# Altium PCB ExtendBoard.PcbDoc
Units mil, origin at the board's own origin, x right, y up, seen from the top; angles counter-clockwise.
Board outline 1157 x 1033 mil, 2 copper layers (Top1, Bottom4), stack 42.17 mil thick; 26 components, 21 nets, 78 pads, 26 vias.
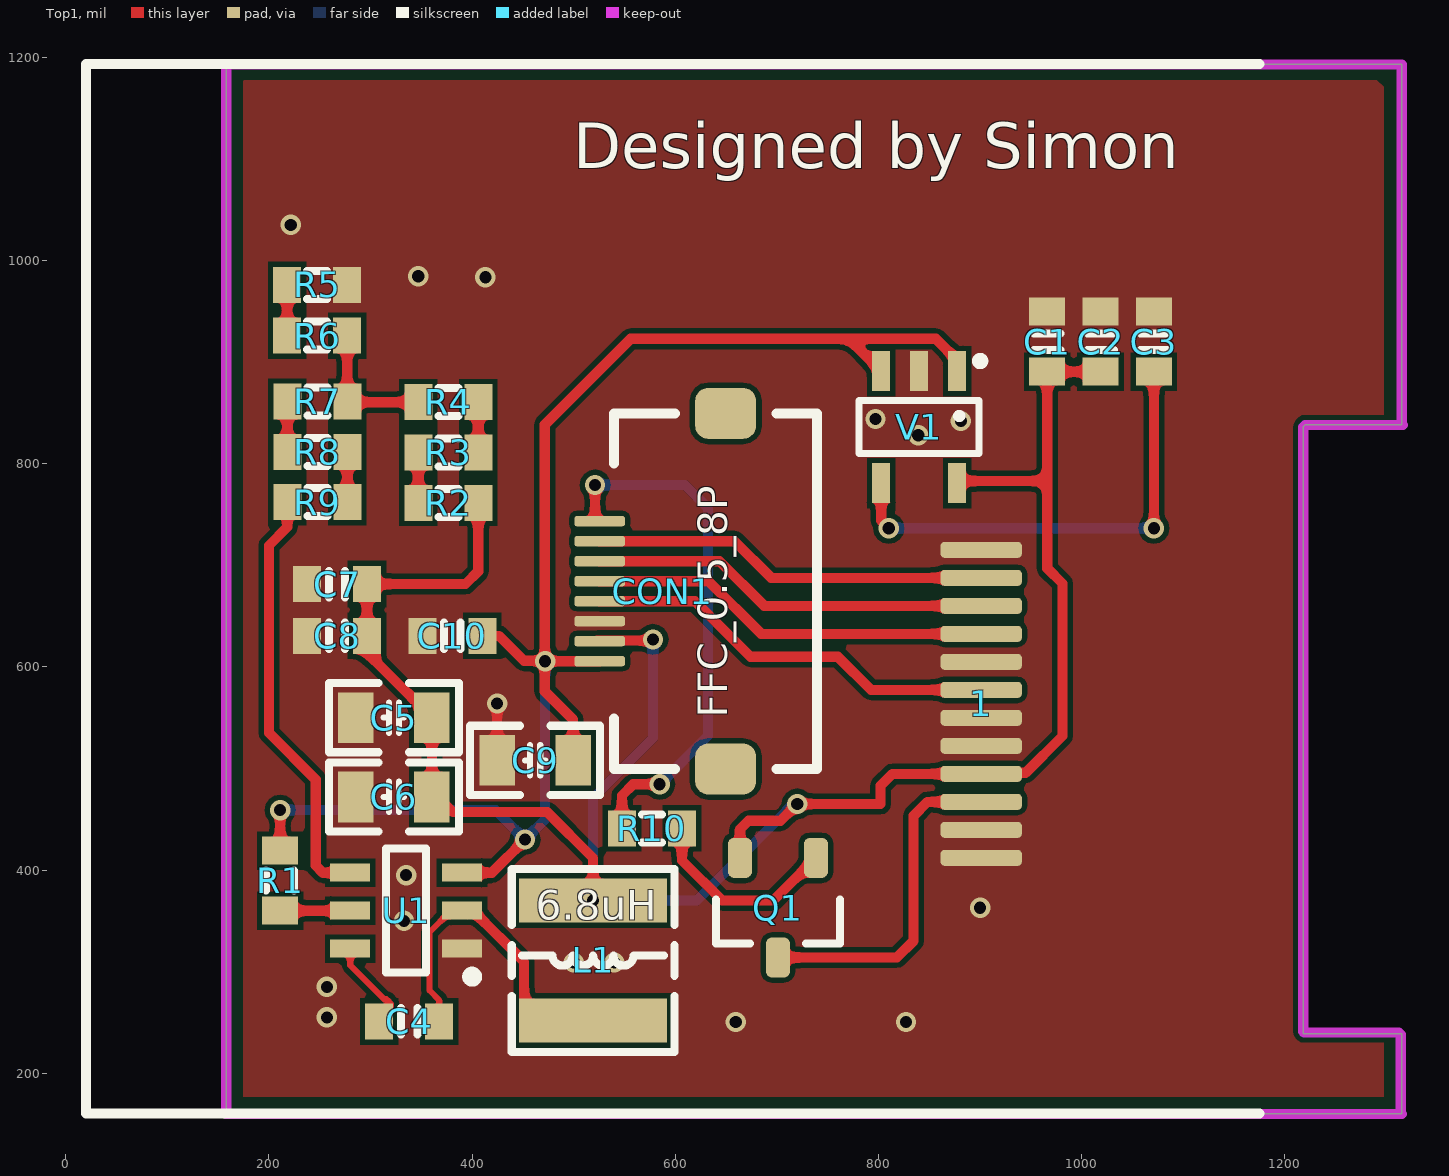
[diagram p0: Top1 view]
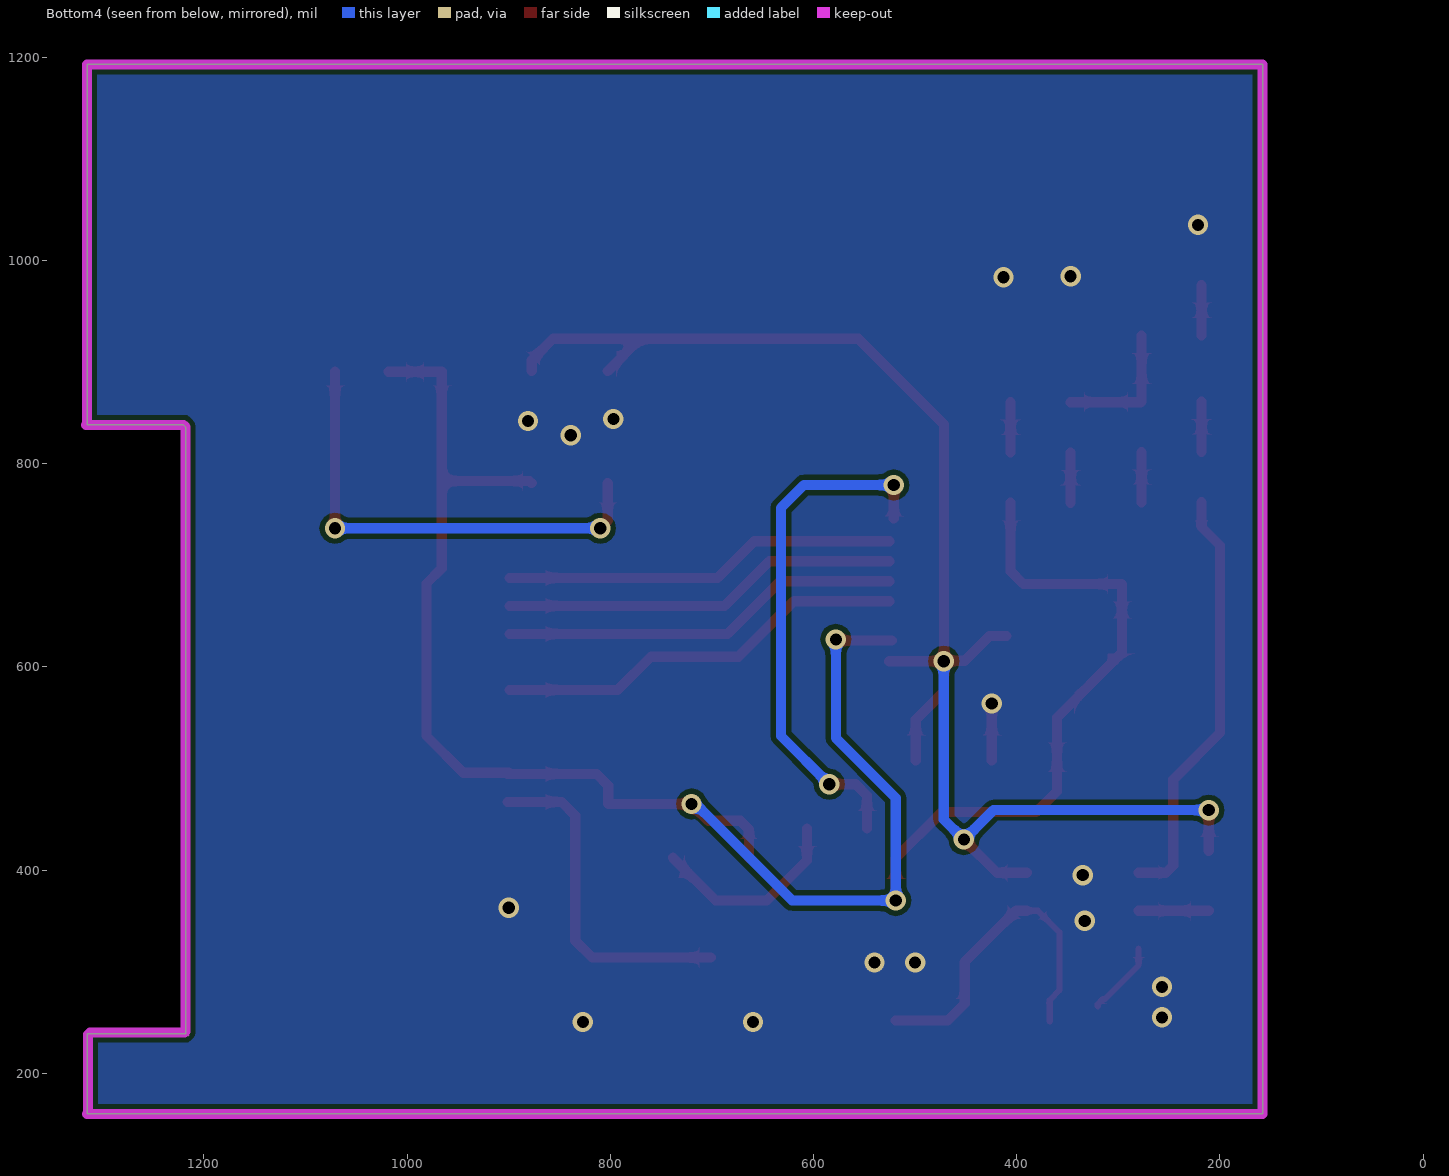
[diagram p1: Bottom4 view, seen from below]

## Layer stack, top to bottom
Top Solder: solder mask 0.4, Solder Resist, Dk 3.5
Top1: signal copper 1.4
Dielectric 2: core 39.37, PP-006, Dk 4.2
Bottom4: signal copper 1.4
Bottom Solder: solder mask 0.4, Solder Resist, Dk 3.5

## Board outline
158,160 158,1193 1315,1193 1315,839 1315,838.49 1220.49,838.49 1218,836 1218,239 1315,239 1315,160

## Design rules (kind name [scope] priority, off if disabled: settings)
Clearance [All] p1: gap=5 ignorepadtopadclearanceinfootprint=FALSE
ComponentClearance [All] p1: gap=0 collisioncheckmode=3 verticalgap=0 showdistances=TRUE
DiffPairsRouting [All] p1: maxlimit=9 minlimit=9 mostfreqgap=9 toplayer_minwidth=4 toplayer_maxwidth=4 toplayer_prefwidth=4 bottomlayer_minwidth=4 bottomlayer_maxwidth=4 bottomlayer_prefwidth=4 maxuncoupledlength=500
FanoutControl Fanout_BGA [All] p1: bgadir=Out bgaviamode=Centered fanoutstyle=Auto fanoutdirection=Alternating viagrid=1 // Fanout_BGA (Default Rule)
HoleSize [All] p1: absolutevalues=TRUE maxlimit=10000 minlimit=8 maxpercent=80.000 minpercent=20.000
MinimumSolderMaskSliver [All] p1 off: minsoldermaskwidth=2
PlaneClearance [All] p1: clearance=8
PlaneConnect [All] p1: planeconnectstyle=Direct reliefexpansion=20 reliefentries=4 reliefconductorwidth=10 reliefairgap=10
PolygonConnect [All] p1: connectstyle=Direct reliefconductorwidth=10 reliefentries=4 polygonreliefangle="90 Angle" airgapwidth=10
RoutingVias [All] p1: holewidth=8 width=16 viastyle="Through Hole" minholewidth=6 minwidth=12 maxholewidth=28 maxwidth=50
SilkToBoardRegionClearance [All] p1 off:
SilkToSilkClearance [All] p1: silktosilkclearance=0
SilkToSolderMaskClearance [IsPad] p1: minsilkscreentomaskgap=0 clearancetoexposedcopper=TRUE
SolderMaskExpansion [All] p1: expansion=3 istentingtop=FALSE
Width [All] p1: maxlimit=10000 minlimit=4 preferedwidth=10
20 further rules are at their usual default settings.

## Components (designator, comment, footprint, x,y, rotation, side; value= is the part's Value field where it differs from the comment)
1 "LCD-240x240" LCD-240x240-NoHole 694,694 r270 bottom locked
C1 "1uF" CAP_0603 951,920 r90 top
C2 "103" CAP_0603 1003.5,920 r90 top
C3 "103" CAP_0603 1086,920 r270 top
C4 "1uF" CAP_0603 338,266 r0 top
C5 "22uF" "C 0805_L" 323,550 r0 top
C6 "22uF" "C 0805_L" 323,472 r0 top
C7 "22uF" CAP_0603 267,696.5 r0 top
C8 "22uF" CAP_0603 267,645.5 r0 top
C9 "22uF" "C 0805_L" 462,508 r0 top
C10 "22uF" CAP_0603 380.5,645.5 r0 top
CON1 "FFC_0.5_8" FFC_0.5_8 614.5,674.5 r90 top locked
L1 "6.8uH" NR4030 519,311 r270 top
Q1 "AO3415A" SOT23-3 701,363 r270 top
R1 "100K" RES_0603 226,389.5 r270 top
R2 "40.2K/3" RES_0603 376.5,776.53 r0 top
R3 "40.2K/3" RES_0603 376.5,796.03 r180 top
R4 "40.2K/3" RES_0603 376.5,875.53 r0 top
R5 "13K/2" RES_0603 247.5,991 r0 top
R6 "13K/2" RES_0603 247.5,911 r180 top
R7 "40.2K/3" RES_0603 247.63,876.03 r0 top
R8 "40.2K/3" RES_0603 247.63,796.53 r180 top
R9 "40.2K/3" RES_0603 247.63,777.03 r0 top
R10 "1K" RES_0603 577,426 r180 top
U1 "MP1471 降压芯片" SOT23-6L 335,360 r90 top
V1 "ME6211C33" SOT23-5L 840,836 r180 top

## Footprints (in the part's own frame and the unit in brackets; to place one, negate y for a bottom-side part, rotate by r counter-clockwise, add the part's x,y. Pads: shape width x height; smd on the part's side, far side on the other; paste and mask are expansions set on the pad)
"C 0805_L" [mil] "无极性贴片电容"
  rect 35x50 smd: 1(-37.4,0) 2(37.4,0)
  silkscreen extent -64,-34 64,34, body extent -39,-24 39,24, height 20
CAP_0603 [mm]
  rect 0.7x0.9 smd: 1(-0.75,-0.381) 2(0.75,-0.381)
  silkscreen extent -0.2,-0.71 0.2,-0.05, body extent -0.85,-0.86 0.85,0.09, height 0.9
FFC_0.5_8 [mil]
  rrect50% 50x60 smd: 0(-175,-35) 0(175,-35)
  rrect50% 10x50 smd: 1(-68.9,89) 2(-49.21,89) 3(-29.53,89) 4(-9.84,89) 5(9.84,89) 6(29.53,89) 7(49.21,89) 8(68.9,89)
  silkscreen extent -175,-125 175,75, body extent -187,-124 187,87, height 82
LCD-240x240-NoHole [mil]
  rrect50% 15.75x80 smd far side: 1(282,-207) 2(254.44,-207) 3(226.88,-207) 4(199.32,-207) 5(171.76,-207) 6(144.2,-207) 7(116.65,-207) 8(89.09,-207) 9(61.53,-207) 10(33.97,-207) 11(6.41,-207) 12(-21.15,-207)
  body extent -499,-565 534,673, height 20
NR4030 [mm] "4.0mm*4.0mm*3.0mm(长*宽*高）"
  rect 1.1x3.7 smd: 1(-1.5,0) 2(1.5,0)
  silkscreen extent -2.29,-2.03 2.29,2.03, body extent -2,-2 2,2, height 3.1
RES_0603 [mm]
  rect 0.7x0.9 smd: 1(-0.75,-0.381) 2(0.75,-0.381)
  silkscreen extent -0.25,-0.73 0.25,-0.03, body extent -0.85,-0.86 0.85,0.09, height 0.9
SOT23-3 [mm] "SOT23, 3-Leads, Body 3.1x3.0mm (max), Pitch 0.95mm, IPC Medium Density"
  rrect50% 1x0.6 smd: 1(-1.246,0.95) 2(-1.246,-0.95) 3(1.246,0)
  silkscreen extent -0.2,-1.55 0.9,1.55, body extent -1.3,-1.45 1.5,1.45, height 1.2
SOT23-5L [mm] "3x1.6x1.1mm(长宽高)"
  rect 0.45x1 smd: 1(-0.95,-1.4) 2(0,-1.4) 3(0.95,-1.4) 4(0.95,1.4) 5(-0.95,1.4)
  silkscreen extent -1.6,-1.73 1.5,0.66, body extent -1.5,-1.4 1.5,1.4, height 1.15
SOT23-6L [mm] "3x1.6x1.1mm(长宽高)"
  rect 0.45x1 smd: 1(-0.95,-1.397) 2(0,-1.397) 3(0.95,-1.397) 4(0.95,1.397) 5(0,1.397) 6(-0.95,1.397)
  silkscreen extent -1.77,-1.78 1.55,0.51, body extent -1.5,-1.4 1.5,1.4, height 1.15

## Part data
1: "显示屏"
C1 C2 C3 C4 C7 C8 C10: library part cap
C5 C6 C9: library part C, "无极性贴片电容", BOM名称=无, 材质=X
CON1: "FFC", System=Connector
L1: library part L-NR, "NR磁胶电感", BOM名称=NR?
Q1: "MOSFET", LatestRevisionDate=17-Jul-2002, LatestRevisionNote="Re-released for DXP Platform.", PackageDescription="TO, Flat Index; 3 In-Line, Axial Leads; Body Dia. 4.6mm; Lead Dia. 0.5 mm (max)", PackageReference=E3, PackageVersion=1995/1996, Published=8-Jun-2000, Publisher="Altium Limited"
R1 R2 R3 R4 R5 R6 R7 R8 R9 R10: library part Res
U1: library part MP1471, "DC降压芯片", BOM名称=DC?
V1: library part ME6211, "低功耗LDO", BOM名称=低

## Via types
v1: diameter 20, hole 12, Top1 to Bottom4, 26 vias

## Nets (pads, with @x,y where several pads share a name; then routed paths per layer and width w, separated by ;. In a path a pad name is that pad's centre, name@x,y a point inside that pad or via, vN(x,y) a via of type N, cw(c..) or ccw(c..) an arc to the next point about the centre after c; other vN are vias at no path point)
3V3: 1.4 C1.1 C2.1 C5.2 C6.2 C7.2 C8.2 CON1.2 L1.1 Q1.2 R2.2 V1.5 | length 2120.1
  Top1 w10: R2.2 406.03,694.03 393.5,681.5 C7.2 C8.2 296.53,613.87 C5.2 360.4,477.6 381,457 473.86,457 519,411.86 v1(519,370.06) ; CON1.2@523,625.79 576.79,625.79 v1(578,627) ; Q1.2 663.6,440.1 672,448.5 703.5,448.5 v1(720.03,465.03) 802,465.03 802,483 813.68,494.68 1.4@899,494.68 ; V1.5 879.52,783 966,783 ; 1.4 1.4@899,494.68 ; C2.1 C1.1 966,783 ; 1.4@899,494.68 900.05,495.73 944.73,495.73 981,532 981,682 966,697 966,783
  Bottom4 w10: v1(578,627) 578,530 519,471 v1(519,370.06) 621.06,370.06 716.03,465.03 v1(720.03,465.03)
DC: 1.7 CON1.4 | length 409.7
  Top1 w10: CON1.4 619.34,664.66 674,610 760,610 792.65,577.35 1.7@899,577.35
FB: R9.1 U1.4 | length 421
  Top1 w10: R9.1 218.1,737.6 200,719.5 200,535 246,489 246,404.5 253.1,397.4 U1.4
GND: 1.1 1.2 1.5 1.6 1.8 1.12 C1.2 C2.2 C3.1 C5.1 C6.1 C7.1 C8.1 C9.1 C10.1 CON1.3 R5.2 U1.1 V1.2 | length 55.9
  Top1 w10: C9.1 v1(424.6,563.9)
  other v1: 659.5,250.5 827,250.5 257,255 257,285 500,309 540,309 333,350 900,363 335,395 839,828 881,842 797,844 413,983.5 346.97,984.5 221.5,1035
LCD_BL: CON1.8 R10.2 | length 522
  Top1 w4: CON1.8@521,745.9 CON1.8@523,743.9
  Top1 w10: CON1.8@521,745.9 v1(521,779) ; R10.2 547.47,473.47 558.5,484.5 v1(584.5,484.5)
  Bottom4 w10: v1(521,779) 609.5,779 632,756.5 632,532 v1(584.5,484.5)
LCD_BL_VCC: 1.3 Q1.3 | length 335.5
  Top1 w10: Q1.3 817.94,313.94 834.5,330.5 834.5,453.5 848.12,467.12 1.3
MOSI: 1.10 CON1.6 | length 391.7
  Top1 w10: CON1.6 643.47,704.03 687.47,660.03 1.10@899,660.03
NetC3_2: C3.2 V1.4 | length 466.4
  Top1 w10: V1.4 802.6,743.9 v1(810,736.5) ; v1(1071,736.5) C3.2
  Bottom4 w10: v1(810,736.5) v1@1075,736.5
NetC4_1: C4.1 U1.6 | length 74.4
  Top1 w6: U1.6 280,306.28 313.44,272.84 315.41,272.84 320.28,267.97 C4.1@320.28,266
NetC4_2: C4.2 L1.2 U1.2 | length 330.4
  Top1 w6: C4.2 367.53,271.97 358,281.5 358,338.83 379.17,360 U1.2
  Top1 w10: U1.2 400.83,360 451.17,309.66 451.17,268.6 467.82,251.94 L1.2
NetQ1_1: Q1.1 R10.1 | length 197.2
  Top1 w10: R10.1 606.53,409.47 646,370 696.35,370 Q1.1
NetR1_2: R1.2 U1.5 | length 69
  Top1 w10: R1.2 U1.5@279.97,359.97
NetR2_1: R2.1 R3.2 | length 49.5
  Top1 w10: R2.1 R3.2
NetR3_1: R3.1 R4.2 | length 49.5
  Top1 w10: R3.1 R4.2
NetR4_1: R4.1 R6.1 R7.2 | length 135.1
  Top1 w10: R6.1 277.03,861.15 R7.2 277.65,860.53 R4.1
NetR5_1: R5.1 R6.2 | length 50
  Top1 w10: R6.2 R5.1
NetR7_1: R7.1 R8.2 | length 49.5
  Top1 w10: R8.2 R7.1
NetR8_1: R8.1 R9.2 | length 49.5
  Top1 w10: R9.2 R8.1
RES: 1.11 CON1.7 | length 388.5
  Top1 w10: CON1.7 658.29,723.71 694.41,687.59 1.11@899,687.59
SCK: 1.9 CON1.5 | length 395
  Top1 w10: CON1.5 632.66,684.34 684.53,632.47 1.9@899,632.47
VDD_5V: C9.2 C10.2 CON1.1 R1.1 U1.3 V1.1 V1.3 | length 1525.7
  Top1 w10: R1.1 v1(211,459) ; U1.3 419.4,397.4 v1(452,430) ; C10.2 426.5,630.5 451,606 v1@471.45,606 ; C9.2 499.4,548.1 471.45,576.05 v1@471.45,606 ; CON1.1 v1(471.85,605.6) v1@471.45,606 ; V1.3 770.72,923 ; V1.1 877.4,901.94 856.35,923 770.72,923 ; v1@471.45,606 471.45,838.45 556,923 770.72,923
  Bottom4 w10: v1(211,459) 423,459 v1(452,430) 471.85,449.85 v1(471.85,605.6)
pads on no net: CON1.0

## Polygon pours and split planes (outlines as drawn)
GND on Bottom4 "GND_L02_P023" (solid, remove dead copper, pour order 23): -14,1247 -23,1238 -23,75 1391,75 1409,93 1370,132 1370,1266
GND on Top1 "NONET_L01_P028" (solid, remove dead copper, pour order 28): 174.5,1177 174.5,177 1297,177 1297,1171 1290.5,1177.5 175.5,1177.5

## Keep-outs
Keep-Out Layer:
  lines w10: 158,160 1315,160 ; 158,160 158,1193 ; 158,160 158,1193 ; 158,160 1315,160 ; 158,1193 1315,1193 ; 158,1193 1315,1193 ; 1315,160 1314,161 1314,238 1312,240 1219,240 1218,241 1218,836 1220,838 1316,838 1315,839 1315,1193

## Silkscreen, mask and mechanical layers (free items; w line width, h text height)
Top Overlay:
  text "Designed by Simon" at 499.5,1091 h45
  text "FFC_0.5_8P" at 661.13,550 h50 r90
  text "6.8uH" at 462.5,341.5 h50
Mechanical 1:
  lines w10: 1218,238 1218,836 1220.49,838.49 1315,838.49 ; 1218,239 1315,239 1315,160 158,160 158,1193 1315,1193 1315,839